# Altium PCB LM7171SMD.PcbDoc
Units mm, origin at the board's own origin, x right, y up, seen from the top; angles counter-clockwise.
Board outline 43.43 x 20.83 mm, 2 copper layers (Top Layer, Bottom Layer); 9 components, 6 nets, 24 pads, 0 vias.
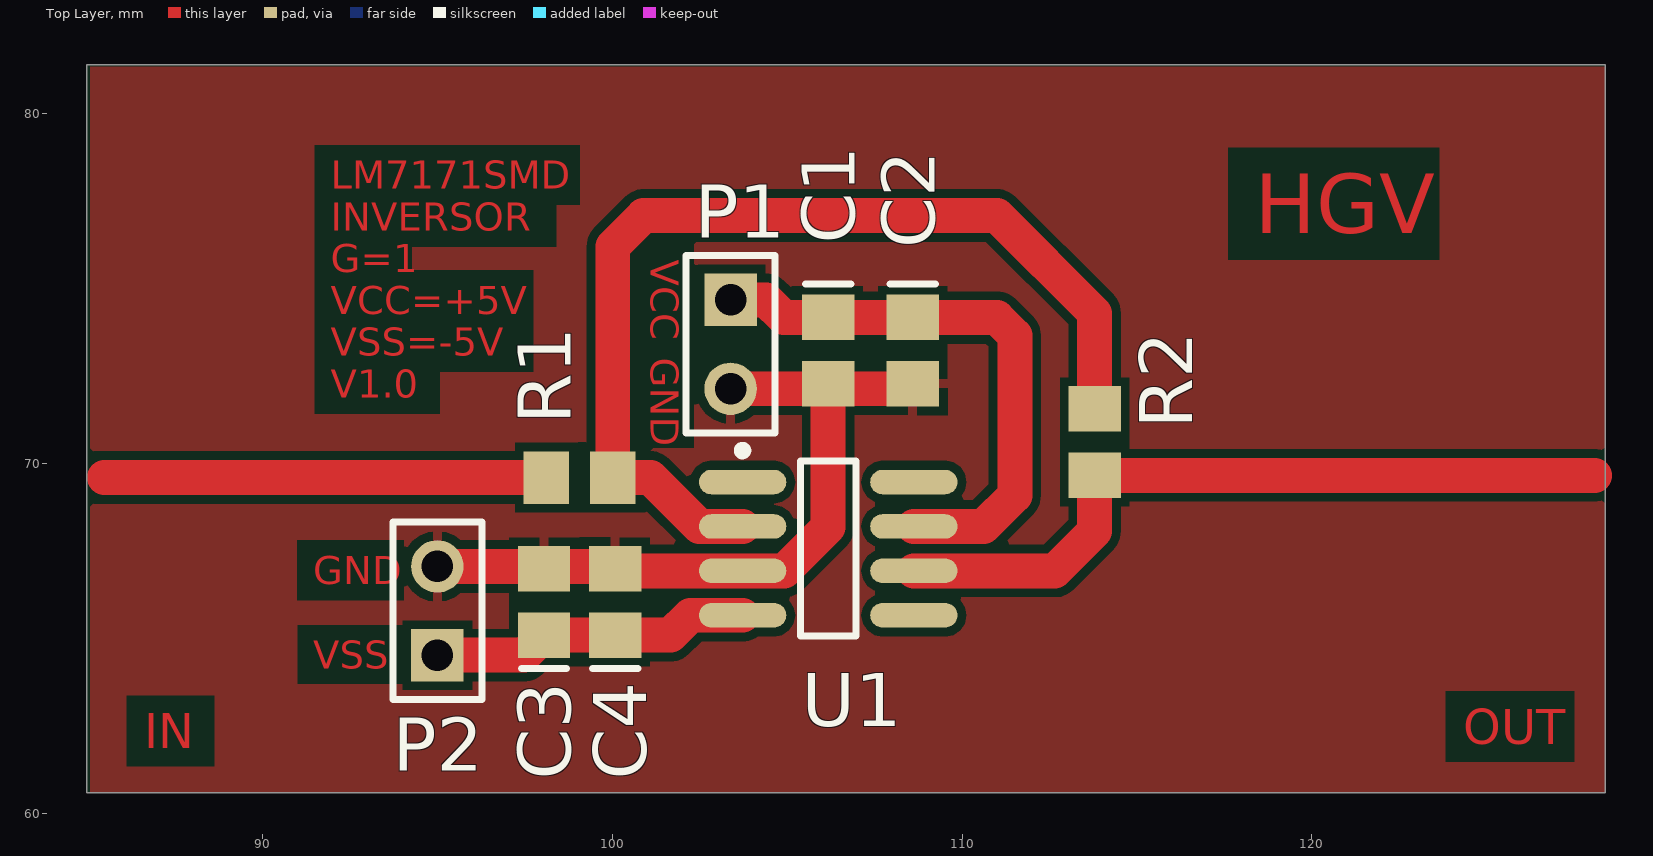
[diagram p0: Top Layer view]
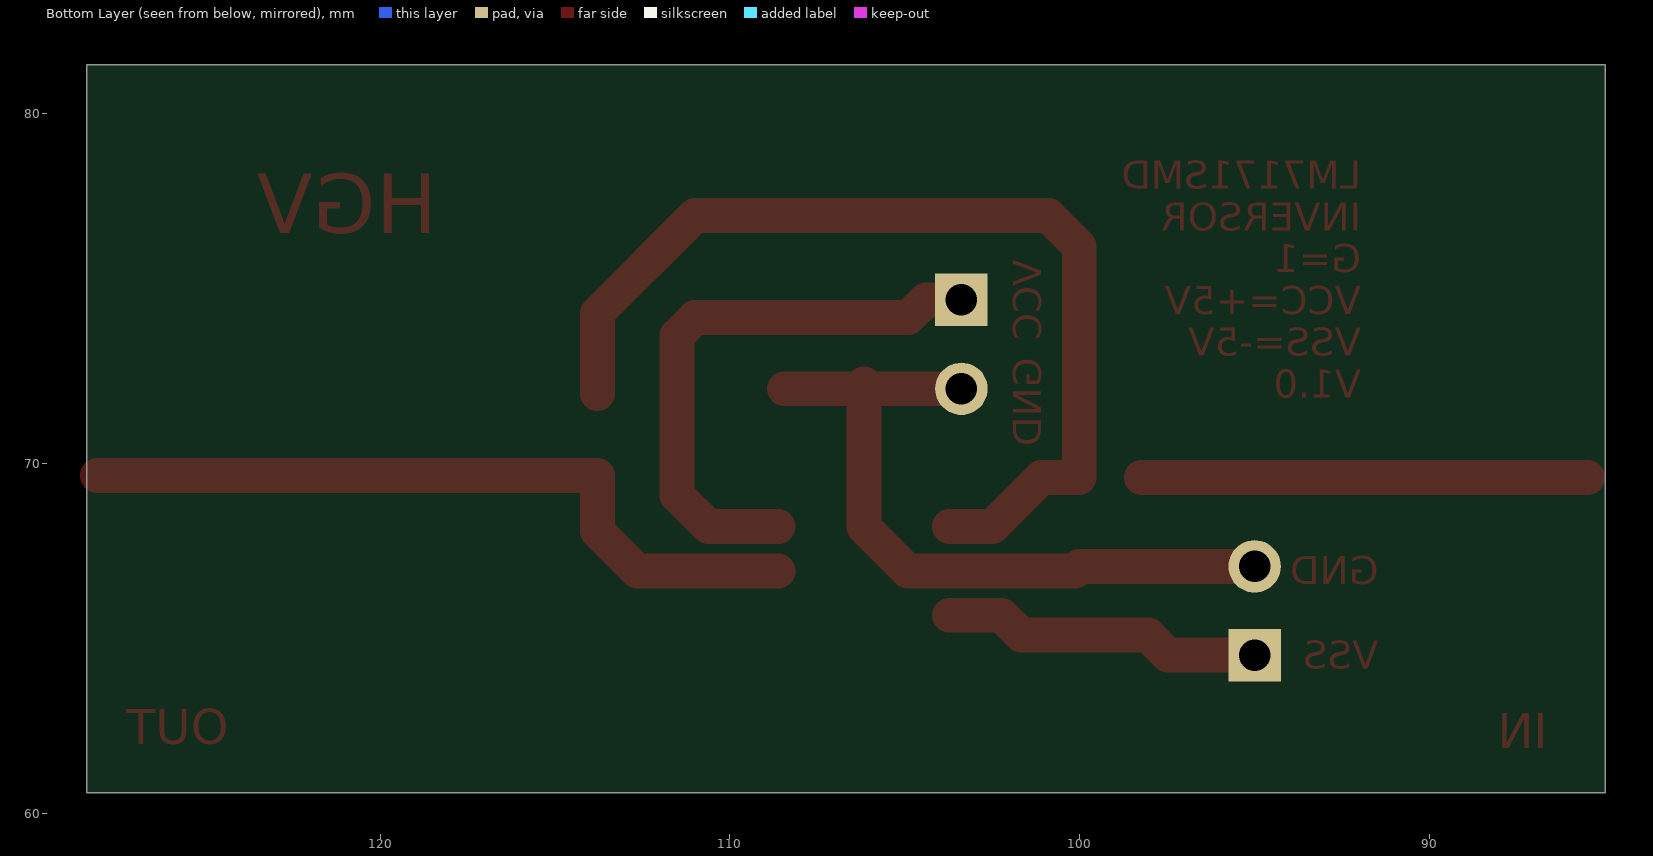
[diagram p1: Bottom Layer view, seen from below]

## Layer stack, top to bottom
Top Layer: signal copper 0.0356
Dielectric: dielectric 0.32, FR-4, Dk 4.8
Bottom Layer: signal copper 0.0356

## Board outline
84.963,60.579 84.963,81.407 128.397,81.407 128.397,60.579

## Design rules (kind name [scope] priority, off if disabled: settings)
Clearance [All] p1: gap=0.254
PolygonConnect [All] p1: connectstyle=Relief reliefconductorwidth=0.254 reliefentries=4 polygonreliefangle="90 Angle"
RoutingVias [All] p1: holewidth=0.711 width=1.27 viastyle="Through Hole" minholewidth=0.711 minwidth=1.27 maxholewidth=0.711 maxwidth=1.27
SilkscreenOverComponentPads [All] p1: minsilkscreentomaskgap=0.254
SolderMaskExpansion [All] p1: expansion=0.102
TestPointUsage [All] p1: valid=0 allowmultiple=FALSE
Testpoint [All] p1: side=15 testpointundercomponent=TRUE minsize=1.016 maxsize=2.54 preferedsize=1.524 minholesize=0 maxholesize=1.016 preferedholesize=0.813 testpointgrid=0.025 style=1023 order=0-112345678
Width [All] p1: maxlimit=5 minlimit=0.254 preferedwidth=0.254 toplayer_prefwidth=1 bottomlayer_maxwidth=0.254 minimp=50.000000 maximp=50.000000 favimp=50.000000
23 further rules are at their usual default settings.

## Components (designator, comment, footprint, x,y, rotation, side; value= is the part's Value field where it differs from the comment)
C1 "Cap Pol3" C0805 106.172,73.23 r270 top
C2 "Cap Pol3" C0805 108.585,73.23 r270 top
C3 "Cap Pol3" C0805 98.044,66.04 r90 top
C4 "Cap Pol3" C0805 100.076,66.04 r90 top
P1 "Header 2" HDR1X2 103.378,74.676 r270 top
P2 "Header 2" HDR1X2 94.996,64.516 r90 top
R1 "Res Semi" 2012[0805] 99.06,69.596 r0 top
R2 "Res Semi" 2012[0805] 113.792,70.612 r270 top
U1 "LM7171BIM" D008_M 106.172,67.564 r0 top

## Footprints (in the part's own frame and the unit in brackets; to place one, negate y for a bottom-side part, rotate by r counter-clockwise, add the part's x,y. Pads: shape width x height; smd on the part's side, far side on the other; paste and mask are expansions set on the pad)
2012[0805] [mm] "Chip Resistor; Body 2.0 x 1.3 mm (LxW typ)"
  rect 1.3x1.5 smd: 1(-0.95,0) 2(0.95,0)
C0805 [mm] "Chip Capacitor; Body 2.0 x 1.2 mm (LxW typ)"
  rect 1.3x1.5 smd: 1(-0.95,0) 2(0.95,0)
  silkscreen extent -1.9,-0.65 -1.9,0.65
D008_M [mm] "SOIC, 8-Leads, Body 4.9x3.9mm, Pitch 1.27mm, IPC Low Density"
  oval 2.5x0.7 smd: 1(-2.45,1.905) 2(-2.45,0.635) 3(-2.45,-0.635) 4(-2.45,-1.905) 5(2.45,-1.905) 6(2.45,-0.635) 7(2.45,0.635) 8(2.45,1.905)
  silkscreen extent -2.57,-2.5 0.8,2.93, body extent -2,-2.5 2,2.5, height 1.75
HDR1X2 [mm] "Connector; Header; 2 Position"
  rect 1.5x1.5 hole 0.9: 1(0,0)
  round 1.5 hole 0.9: 2(2.54,0)
  silkscreen extent -1.27,-1.27 3.81,1.27

## Part data
C1 C2 C3 C4: "Polarized Capacitor (Surface Mount)"
P1 P2: "Header, 2-Pin"
R1 R2: "Semiconductor Resistor"
U1: library part LF351D, "Operational Amplifier"

## Nets (pads, with @x,y where several pads share a name; then routed paths per layer and width w, separated by ;. In a path a pad name is that pad's centre, name@x,y a point inside that pad or via, vN(x,y) a via of type N, cw(c..) or ccw(c..) an arc to the next point about the centre after c; other vN are vias at no path point)
GND: C1.2 C2.2 C3.2 C4.2 P1.2 P2.2 U1.3 | length 20.9
  Top Layer w1: P2.2 100.01,67.056 100.137,66.929 U1.3 104.913,66.929 106.172,68.188 C1.2@106.172,72.136 ; P1.2 C1.2@106.172,72.136 ; C1.2 C1.2@106.172,72.136 ; C2.2@108.441,72.136 C1.2@106.172,72.136
IN: R1.1 | length 12.8
  Top Layer w1: 85.471,69.596 R1.1@98.237,69.596
NODEX: R1.2 R2.1 U1.2 | length 28.5
  Top Layer w1: U1.2 102.489,68.199 101.092,69.596 R1.2 100.01,76.203 100.896,77.089 110.998,77.089 113.792,74.295 R2.1@113.792,72.004
OUT: R2.2 U1.6 | length 21.5
  Top Layer w1: U1.6 112.649,66.929 113.792,68.072 R2.2 128.082,69.662
VCC: C1.1 C2.1 P1.1 U1.7 | length 16.4
  Top Layer w1: P1.1 104.394,74.676 104.902,74.168 C2.1@108.585,74.168 ; C2.1@108.597,74.168 110.998,74.168 111.506,73.66 111.506,69.088 110.617,68.199 U1.7
VSS: C3.1 C4.1 P2.1 U1.4 | length 9.2
  Top Layer w1: P2.1 97.47,64.516 C3.1 C4.1 101.666,65.09 102.235,65.659 U1.4
pads on no net: U1.1 U1.5 U1.8

## Polygon pours and split planes (outlines as drawn)
GND on Top Layer "Bottom Layer-No Net" (solid): 85.063,81.342 128.397,81.342 128.397,60.579 85.063,60.579

## Other copper
Top Layer:
  text "LM7171SMD" at 91.948,77.851 h0.8
  text "INVERSOR" at 91.948,76.657 h0.8
  text "HGV" at 118.364,76.581 h1.7
  text "VCC" at 101.092,75.819 h0.8 r270
  text "G=1" at 91.948,75.463 h0.8
  text "VCC=+5V" at 91.948,74.27 h0.8
  text "VSS=-5V" at 91.948,73.076 h0.8
  text "GND" at 101.092,73.025 h0.8 r270
  text "V1.0" at 91.948,71.882 h0.8
  text "GND" at 91.44,66.548 h0.8
  text "VSS" at 91.44,64.135 h0.8
  text "OUT" at 124.333,61.976 h1
  text "IN" at 86.614,61.849 h1

## Silkscreen, mask and mechanical layers (free items; w line width, h text height)
Mechanical 1:
  the board outline again, w0.1